# Altium PCB Carte_test_JLC.PcbDoc
Units mm, origin at the board's own origin, x right, y up, seen from the top; angles counter-clockwise.
Board outline 40.15 x 36.59 mm, 4 copper layers (Top Copper, Ground Plane, Power Plane, Bottom Copper), stack 1.57 mm thick; 32 components, 0 nets, 105 pads, 1 vias.
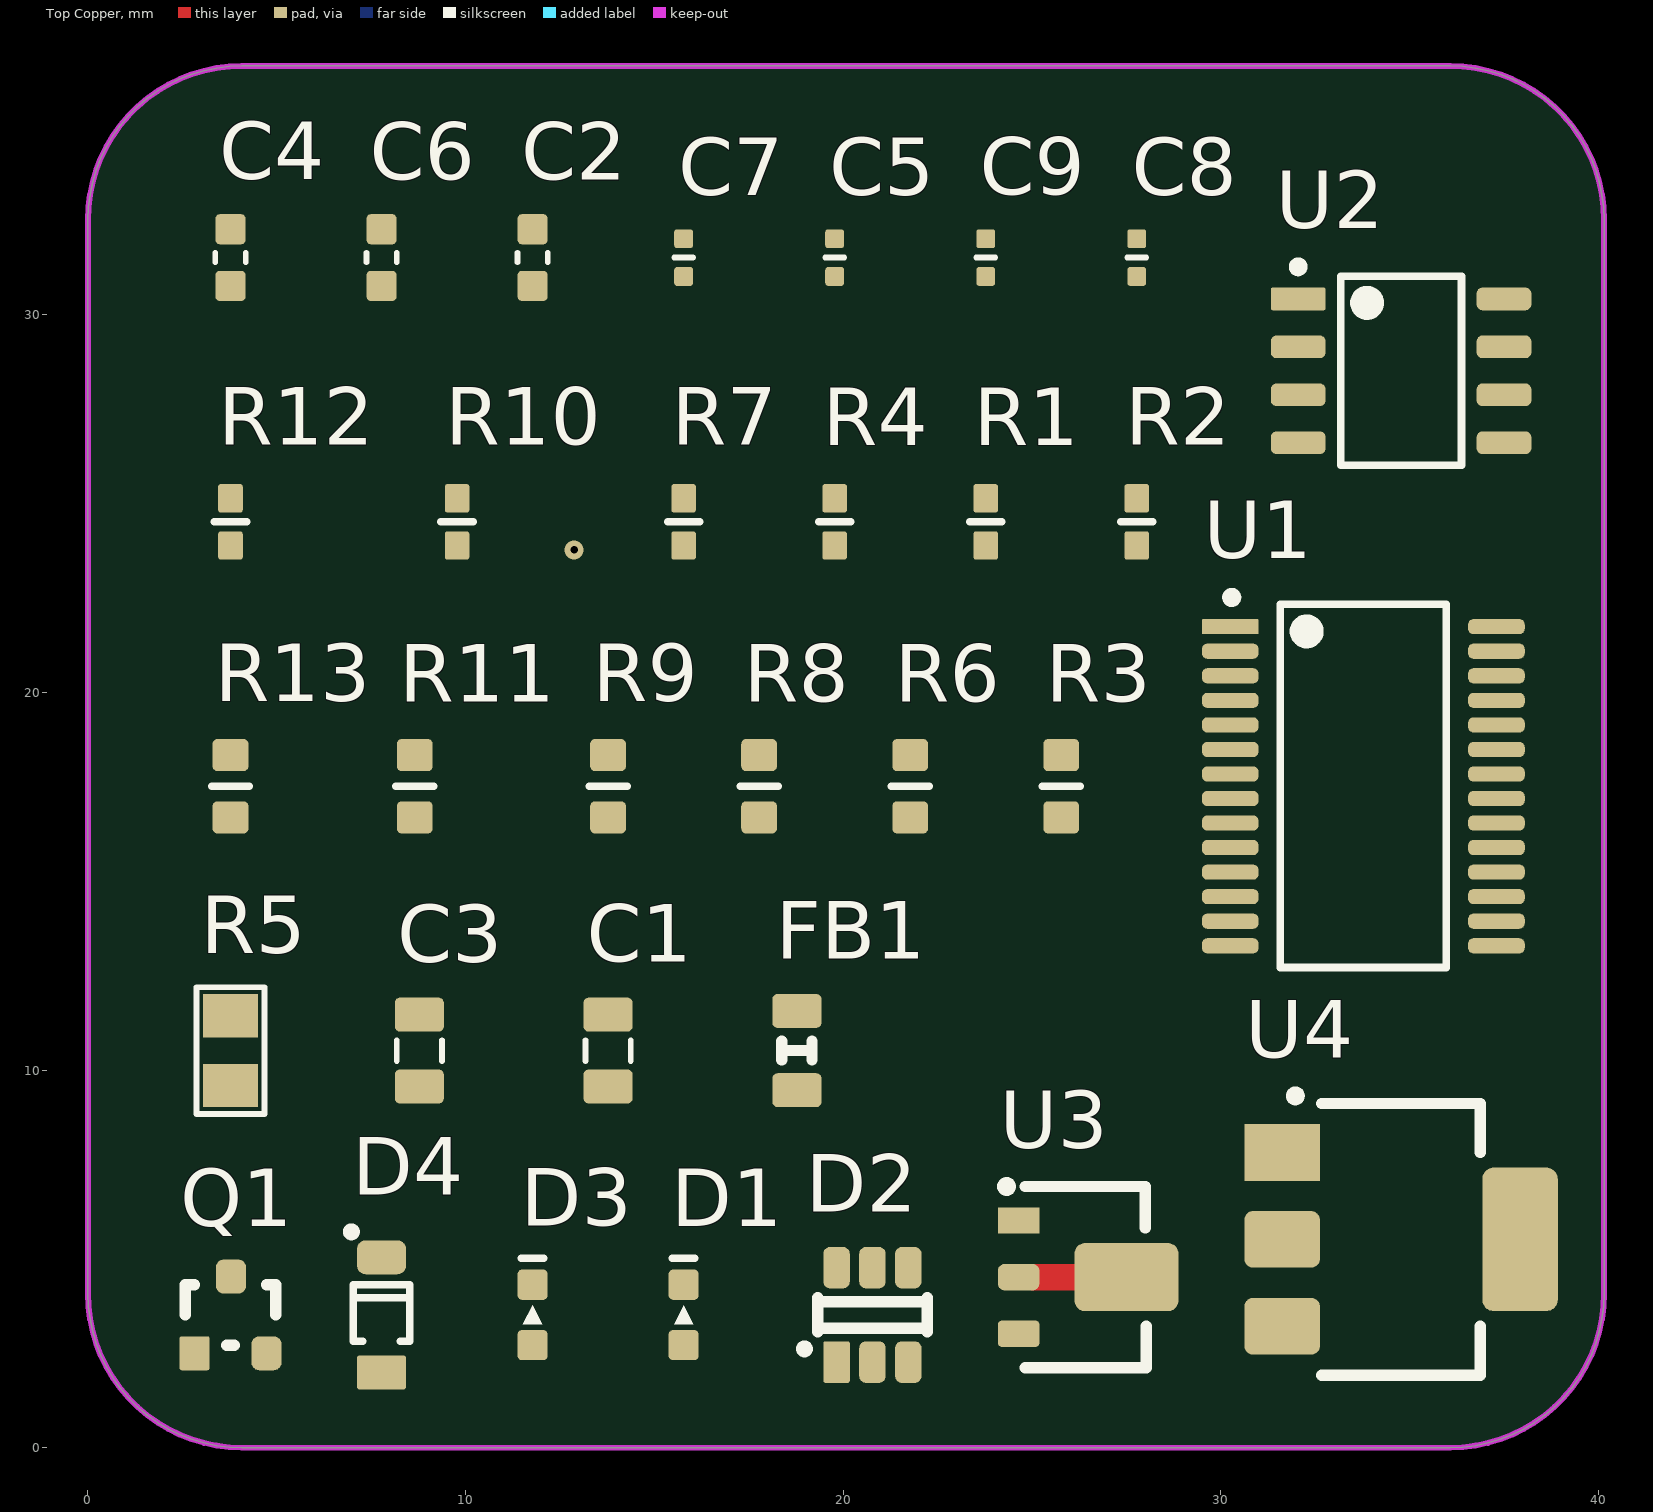
[diagram p0: Top Copper view]
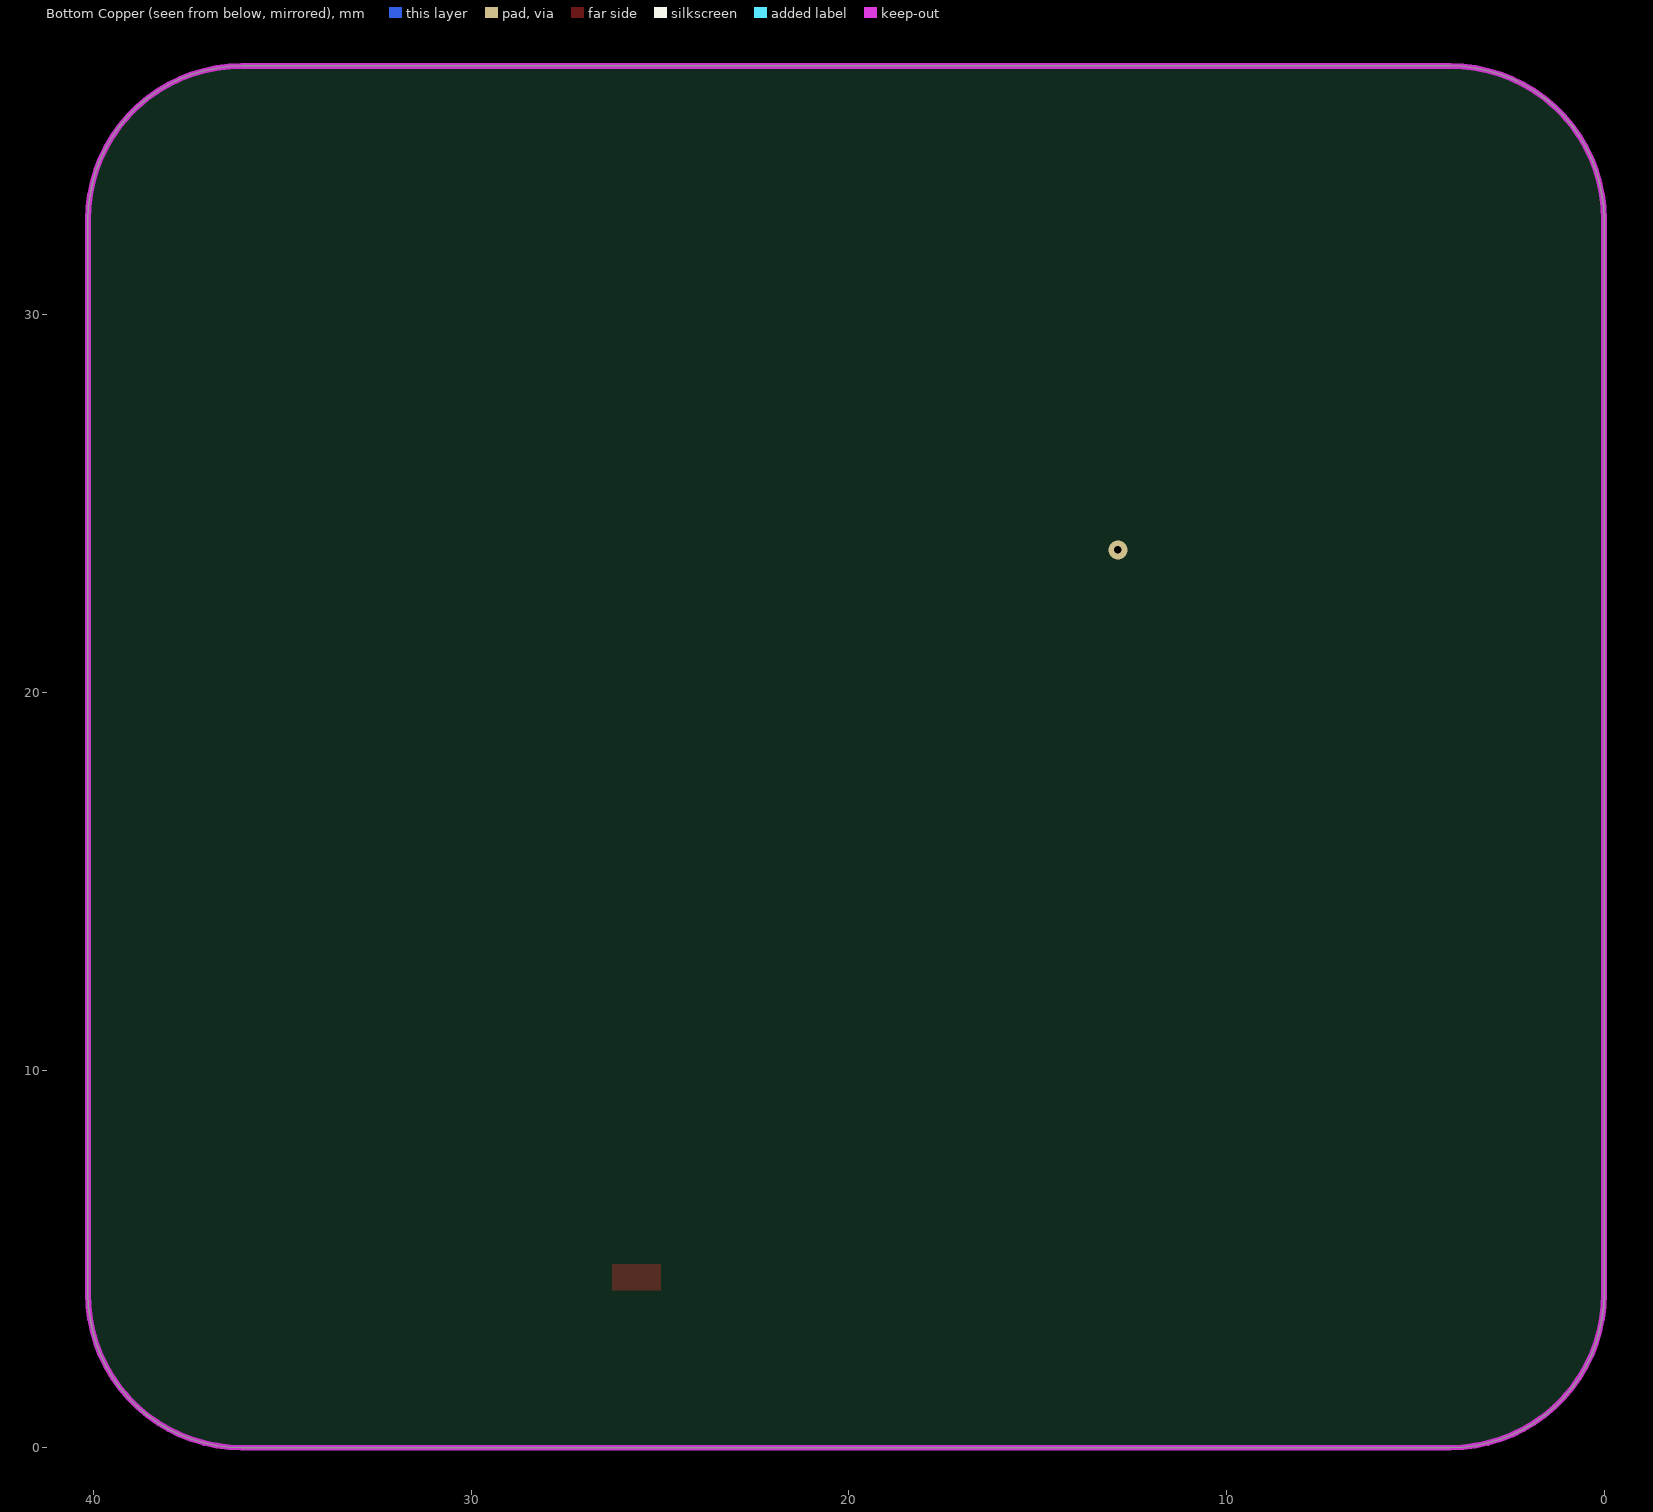
[diagram p1: Bottom Copper view, seen from below]
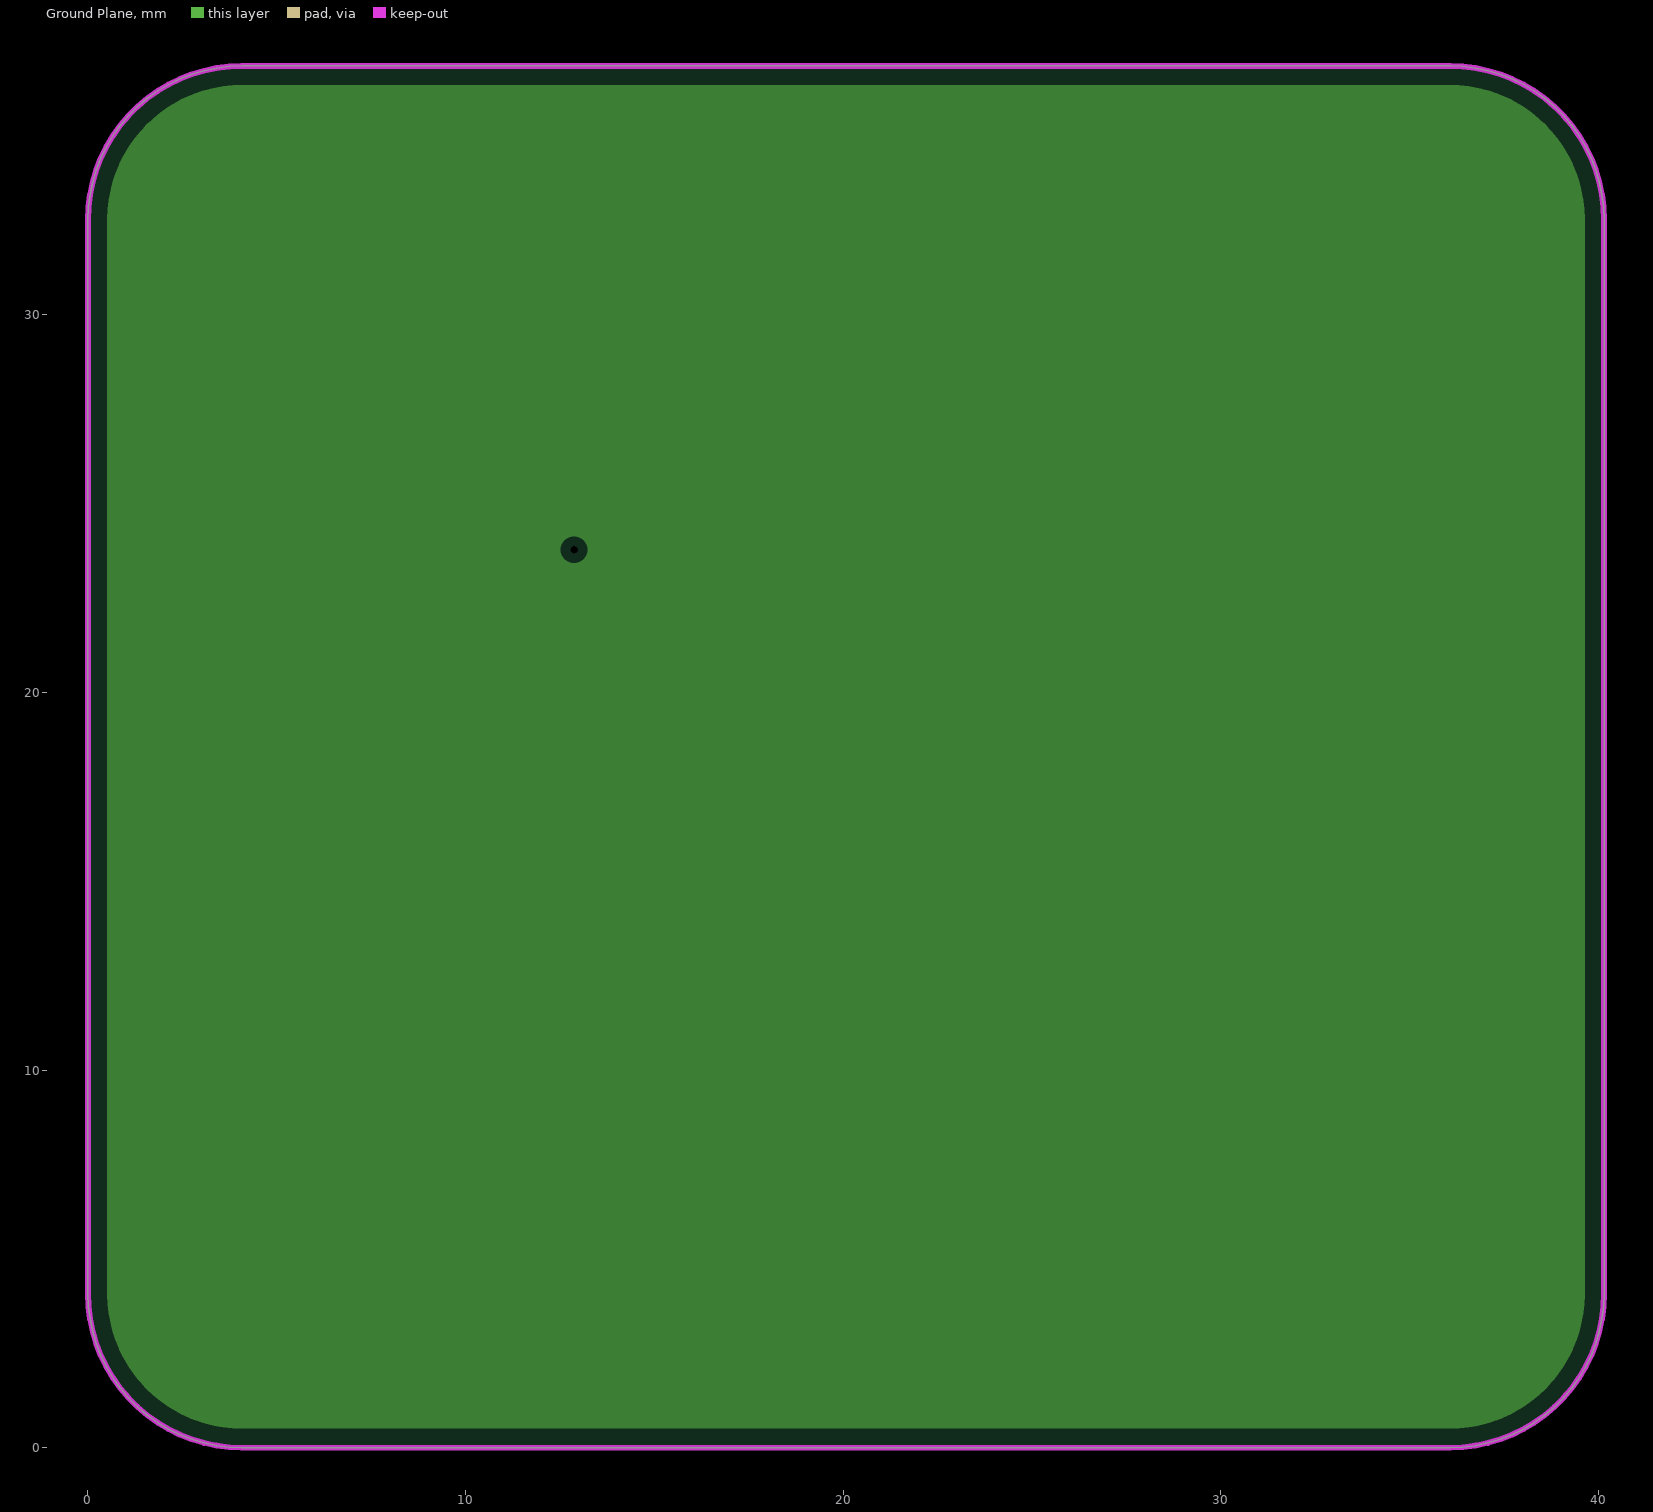
[diagram p2: Ground Plane, clearances drawn from the general rule]
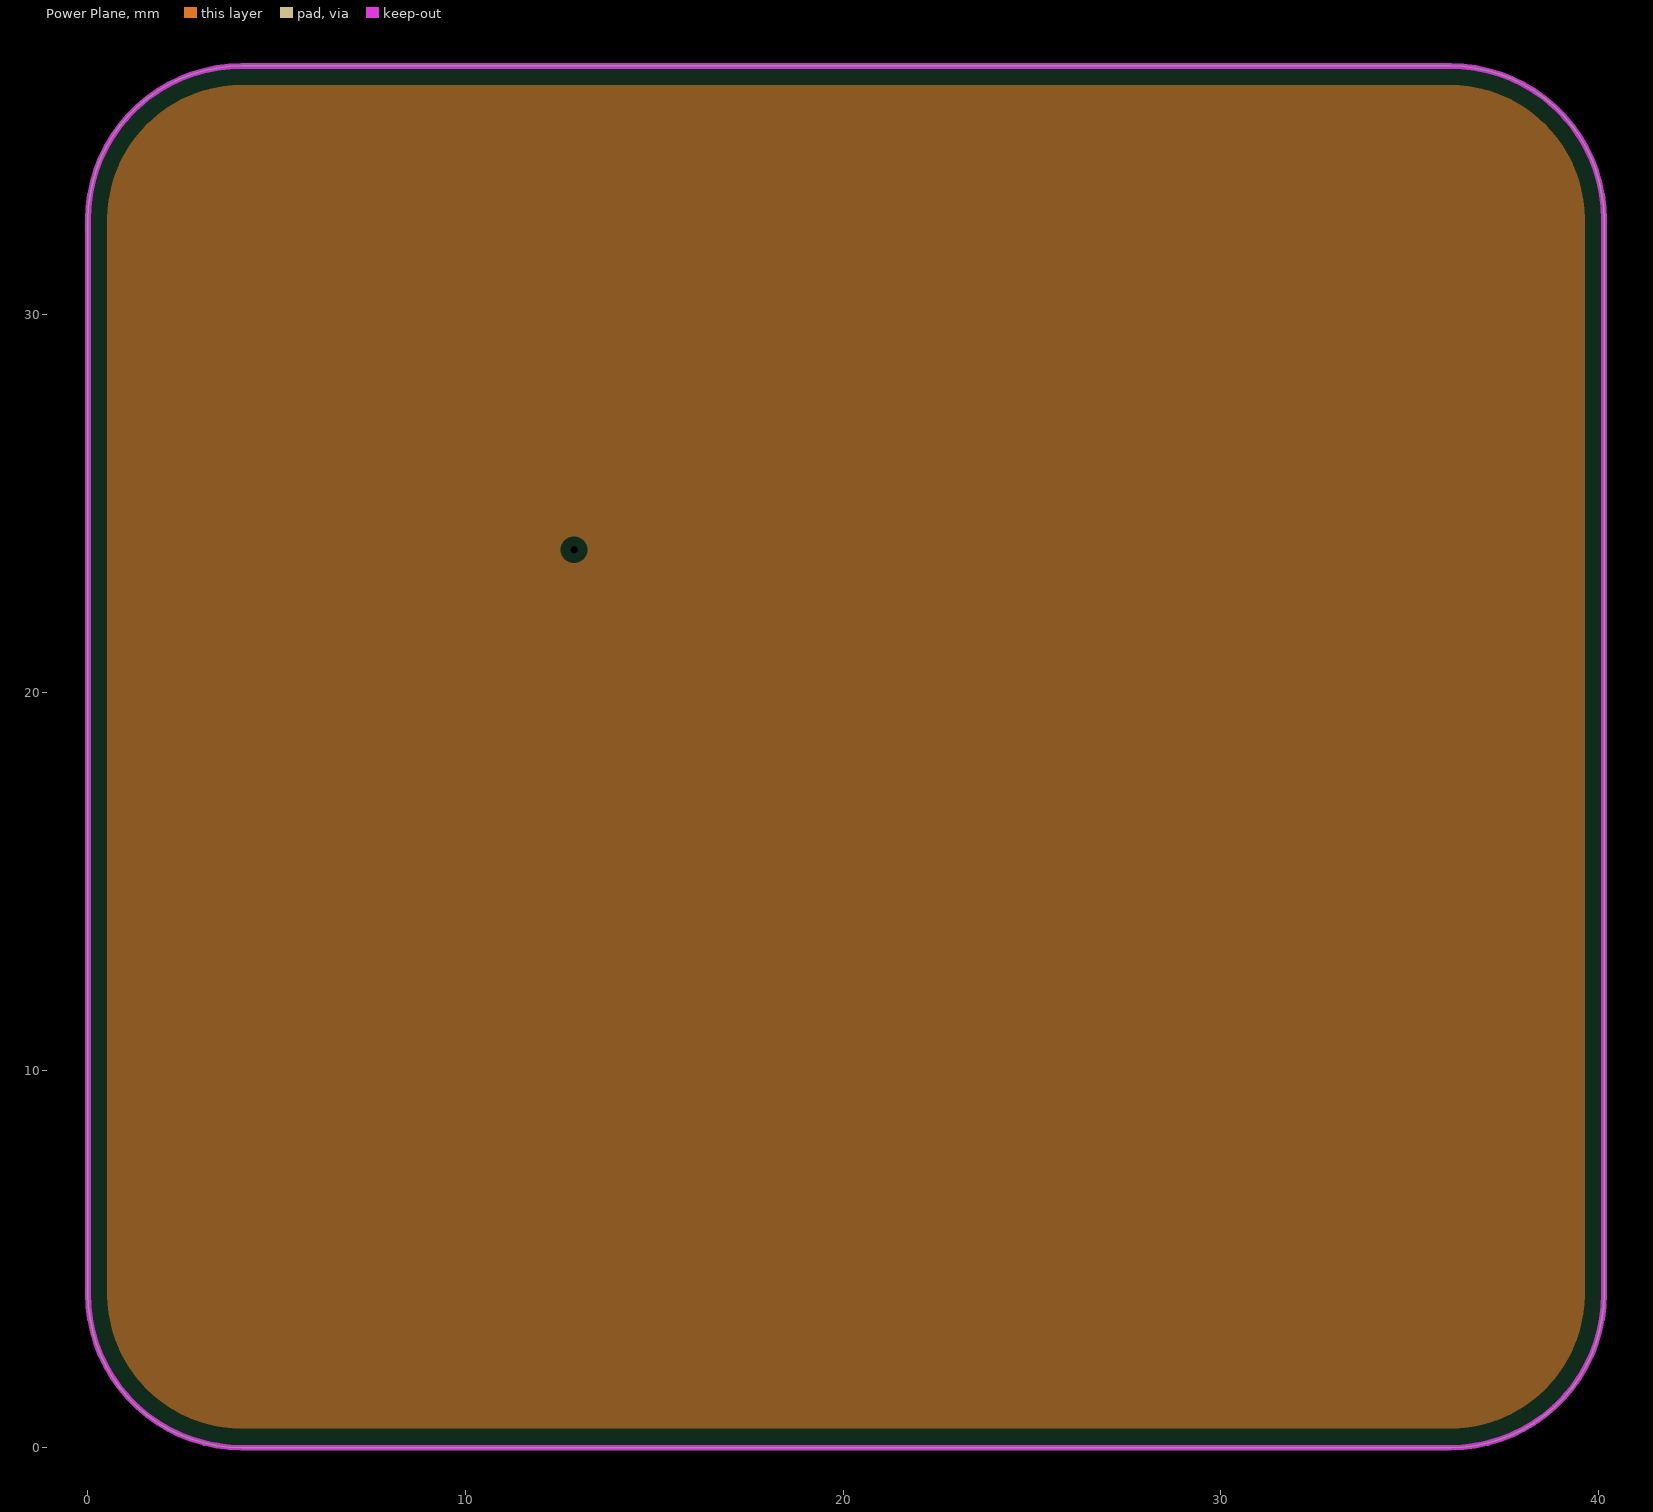
[diagram p3: Power Plane, clearances drawn from the general rule]

## Layer stack, top to bottom
Top Mask: solder mask 0.015, Solder Resist, Dk 3.8
Top Copper: signal copper 0.035
Dielectric 1: prepreg 0.2, 7628, Dk 4.6
Ground Plane: plane copper 0.0175
Core: core 1.065, FR-4, Dk 4.5
Power Plane: plane copper 0.0175
Dielectric 2: prepreg 0.2, 7628, Dk 4.6
Bottom Copper: signal copper 0.035
Bottom Mask: solder mask 0.015, Solder Resist, Dk 3.8

## Board outline
0,4.075 cw(c4.075,4.075) 0,4.075 cw(c0.075,4.075) 0,4.075 0,32.515 cw(c0.075,32.515) 0,32.516 cw(c4.075,32.515) 4.075,36.591 cw(c4.075,36.515) 4.076,36.591 36.075,36.591 cw(c36.075,32.515) 40.151,32.516 cw(c40.075,32.515) 40.151,32.515 cw(c40.075,32.515) 40.151,32.515 ccw(c36.075,32.515) 40.151,32.516 40.151,4.075 cw(c40.075,4.075) 40.151,4.075 ccw(c36.075,4.075) 40.151,4.075 ccw(c40.075,4.075) 40.151,4.075 cw(c36.075,4.075) 36.075,0 4.075,0 cw(c4.075,4.075)

## Design rules (kind name [scope] priority, off if disabled: settings)
AssemblyTestPointUsage [All] p1 off:
AssemblyTestpoint [All] p1 off: testpointundercomponent=TRUE minsize=1.016 maxsize=2.54 preferedsize=1.524 minholesize=0 maxholesize=1.016 preferedholesize=0.813 testpointgrid=0.025 usegrid=TRUE gridtolerance=0 allowsidetop=TRUE allowsidebottom=TRUE
BoardOutlineClearance [All] p1: gap=0.2 ignorepadtopadclearanceinfootprint=FALSE
Clearance Clearance_Outer_layer [OnOutside] p1: gap=0.127 ignorepadtopadclearanceinfootprint=FALSE except(0.09: Arc-Arc Arc-Track Track-Track; 0.2: Arc-SMDPad Track-SMDPad; 0.254: Arc-Hole Track-Hole SMDPad-Hole THPad-Hole Via-Hole Fill-Hole Poly-Hole Region-Hole Text-Hole; 0.33: Arc-THPad Track-THPad SMDPad-THPad; 0.54: THPad-THPad)
Clearance Clearance_Inner_layer [not OnOutside] p2: gap=0.127 ignorepadtopadclearanceinfootprint=FALSE except(0.2: Arc-SMDPad Track-SMDPad; 0.254: Arc-Hole Track-Hole SMDPad-Hole THPad-Hole Via-Hole Fill-Hole Poly-Hole Region-Hole Text-Hole; 0.33: Arc-THPad Track-THPad SMDPad-THPad; 0.54: THPad-THPad)
ComponentClearance [IsComponent and (not (InComponent('J202') or InComponent('J204'))) vs IsComponent and (not (InComponent('J201') or InComponent('J203')))] p1: gap=0.2 collisioncheckmode=3 verticalgap=2540 showdistances=FALSE
DiffPairsRouting [All] p1 off: maxlimit=0.254 minlimit=0.254 mostfreqgap=0.254 toplayer_minwidth=0.381 toplayer_maxwidth=0.381 toplayer_prefwidth=0.381 bottomlayer_minwidth=0.381 bottomlayer_maxwidth=0.381 bottomlayer_prefwidth=0.381 maxuncoupledlength=12.7
FabricationTestPointUsage TestPointUsage [All] p1 off: valid=0 allowmultiple=FALSE
FabricationTestpoint Testpoint [All] p1 off: side=3 testpointundercomponent=TRUE minsize=1.016 maxsize=2.54 preferedsize=1.524 minholesize=0 maxholesize=1.016 preferedholesize=0.813 testpointgrid=0.025 allowsidetop=TRUE allowsidebottom=TRUE usegrid=TRUE gridtolerance=0
FanoutControl Fanout_BGA [IsBGA] p1 off: bgadir=Out bgaviamode=Centered fanoutstyle=Auto fanoutdirection=Alternating viagrid=0.025 // Fanout_BGA (Default Rule)
FanoutControl Fanout_LCC [IsLCC] p2 off: bgadir=Out bgaviamode=Centered fanoutstyle=Auto fanoutdirection=Alternating viagrid=0.025 // Fanout_LCC (Default Rule)
FanoutControl Fanout_SOIC [IsSOIC] p3 off: bgadir=Out bgaviamode=Centered fanoutstyle=Auto fanoutdirection=Alternating viagrid=0.025 // Fanout_SOIC (Default Rule)
FanoutControl Fanout_Small [(CompPinCount < 5)] p4 off: bgadir=Out bgaviamode=Centered fanoutstyle=Auto fanoutdirection=OutThenIn viagrid=0.025 // Fanout_Small (Default Rule)
FanoutControl Fanout_Default [All] p5 off: bgadir=Out bgaviamode=Centered fanoutstyle=Auto fanoutdirection=Alternating viagrid=0.025 // Fanout_Default (Default Rule)
HoleSize [All] p1: absolutevalues=TRUE maxlimit=6.3 minlimit=0.2 maxpercent=80.000 minpercent=20.000
HoleToHoleClearance ViaToViaClearance [IsVia vs IsVia] p1: gap=0.254 allowstackedmicrovias=TRUE
HoleToHoleClearance [All] p2: gap=0.54 allowstackedmicrovias=TRUE
MinimumAnnularRing [All] p1: minimumring=0.13
MinimumSolderMaskSliver [All] p1: minsoldermaskwidth=0.075
NetAntennae NetAntenna [All] p1: netantennaetolerance=0
PlaneClearance [All] p1: clearance=0.254
PlaneConnect [All] p1: planeconnectstyle=Direct reliefexpansion=0.3 reliefentries=4 reliefconductorwidth=0.3 reliefairgap=0.2
PolygonConnect [All] p1: thpad.connectstyle=Relief thpad.reliefconductorwidth=0.2 thpad.reliefentries=4 thpad.polygonreliefangle="90 Angle" thpad.airgapwidth=0.254 smdpad.connectstyle=Relief smdpad.reliefconductorwidth=0.2 smdpad.reliefentries=4 smdpad.polygonreliefangle="90 Angle" smdpad.airgapwidth=0.254 via.connectstyle=Direct via.reliefconductorwidth=0.2 via.reliefentries=4 via.polygonreliefangle="90 Angle" via.airgapwidth=0.254
RoutingVias [All] p1: holewidth=0.2 width=0.5 viastyle="Through Hole" minholewidth=0.2 minwidth=0.45 maxholewidth=0.3 maxwidth=0.9
SMDEntry [All] p1: side=TRUE corner=TRUE anyangle=TRUE
SilkToSilkClearance [All] p1 off: silktosilkclearance=0.15
SilkToSolderMaskClearance [IsPad] p1: minsilkscreentomaskgap=0.15 clearancetoexposedcopper=TRUE
SolderMaskExpansion [All] p1: expansion=0.05 istentingtop=FALSE
Width Width_Outer_Layer [OnLayer('Component Side') or OnLayer('Solder Side')] p1: maxlimit=3 minlimit=0.09 preferedwidth=0.15
Width Width_Inner_Layer [All] p2: maxlimit=3 minlimit=0.127 preferedwidth=0.15
11 further rules are at their usual default settings.

## Classes and differential pairs
net class USB: NetJ207_4 NetU200_2 NetU200_3 NetU200_6 NetU200_9 NetU200_10 NetU200_11 NetU200_12 NetU200_13 NetU200_14 NetU200_19 NetU200_27 NetU200_28
net class NUCLEO: NetJ221_9 NetJ221_25 NetJ221_33 NetJ221_39 NetJ221_40 NetJ222_39 NetJ222_40
net class DYNAMIXEL: NetJ240_2
net class CAN: NetU201_5

## Components (designator, comment, footprint, x,y, rotation, side; value= is the part's Value field where it differs from the comment)
C1 "10uF" "WCAP-CSGP_0805, 2x1.25x1.25" 13.775,10.515 r90 top
C2 "4.7uF" "WCAP-CSGP_0603, 1.6x0.8x0.8" 11.775,31.515 r90 top
C3 "1uF" "WCAP-CSGP_0805, 2x1.25x1.25" 8.775,10.515 r90 top
C4 "1uF" "WCAP-CSGP_0603, 1.6x0.8x0.8" 3.775,31.515 r90 top
C5 "1uF" "WCAP-CSGP_0402, 1x0.5x0.5" 19.775,31.515 r90 top
C6 "100nF" "WCAP-CSGP_0603, 1.6x0.8x0.8" 7.775,31.515 r90 top
C7 "100nF" "WCAP-CSGP_0402, 1x0.5x0.5" 15.775,31.515 r90 top
C8 "10nF" "WCAP-CSGP_0402, 1x0.5x0.5" 27.775,31.515 r90 top
C9 "1nF" "WCAP-CSGP_0402, 1x0.5x0.5" 23.775,31.515 r90 top
D1 "150060YS75000" SMCW_0603 15.775,3.515 r270 top value=Jaune
D2 "824001" SOT-23-6L 20.775,3.515 r0 top value=5V
D3 "150060RS75000" SMCW_0603 11.775,3.515 r270 top value=Rouge
D4 "RBR3MM40ATFTR" SOD-123FL 7.775,3.515 r90 top value=40V
FB1 "742792023" "WE-CBF_0805_High Current" 18.775,10.515 r90 top value=120
Q1 "2N7002" SOT-23 3.775,3.515 r0 top
R1 "RC0402FR-07100KL" RESC1005X04N 23.775,24.515 r90 top value=100k
R2 "RC0402FR-0710KL" RESC1005X04N 27.775,24.515 r90 top value=10k
R3 "RC0603FR-0710KL" RESC1608X06N 25.775,17.515 r90 top value=10k
R4 "RC0402FR-074K7L" RESC1005X04N 19.775,24.515 r90 top value=4.7k
R5 "RC0805FR-072K7L" RESC2012X06N 3.775,10.515 r90 top value=2.7k
R6 "RC0603FR-071K8L" RESC1608X06N 21.775,17.515 r90 top value=1.8k
R7 "RC0402FR-071KL" RESC1005X04N 15.775,24.515 r90 top value=1k
R8 "RC0603FR-071KL" RESC1608X06N 17.775,17.515 r90 top value=1k
R9 "RC0603FR-07620RL" RESC1608X06N 13.775,17.515 r90 top value=620
R10 "RC0402FR-07330RL" RESC1005X04N 9.775,24.515 r90 top value=330
R11 "RC0603FR-0768RL" RESC1608X06N 8.655,17.515 r90 top value=68
R12 "RC0402FR-0722RL" RESC1005X04N 3.775,24.515 r90 top value=22
R13 "RC0603FR-070RL" RESC1608X06N 3.775,17.515 r90 top value=0
U1 "FT232RL" SSOP28 33.775,17.515 r0 top
U2 "MCP2551-I/SN" SOIC127P600X175-8N 34.775,28.515 r0 top
U3 "HT7533-1" SOT89-150P350X160-3N 26.775,4.515 r0 top value=3.3V
U4 "ZLDO1117G33TA" SOT223 34.775,5.515 r0 top value=3.3V

## Footprints (in the part's own frame and the unit in brackets; to place one, negate y for a bottom-side part, rotate by r counter-clockwise, add the part's x,y. Pads: shape width x height; smd on the part's side, far side on the other; paste and mask are expansions set on the pad)
RESC1005X04N [mm] "Chip Resistor, 2-Leads, Body 1,1x0,5mm, IPC Medium Density"
  rrect20% 0.75x0.65 smd: 1(-0.625,0) 2(0.625,0)
  silkscreen extent 0,-0.43 0,0.43, body extent -0.5,-0.25 0.5,0.25, height 0.35
RESC1608X06N [mm] "Chip Resistor, 2-Leads, Body 1,6x0,8mm, IPC Medium Density"
  rrect30% 0.85x0.95 smd: 1(-0.825,0) 2(0.825,0)
  silkscreen extent 0,-0.5 0,0.5, body extent -0.78,-0.43 0.78,0.43, height 0.45
RESC2012X06N [mm] "Chip Resistor, 2-Leads, Body 2,0x1,3mm, IPC Medium Density"
  rect 1.15x1.45 smd: 1(-0.925,0) 2(0.925,0)
  silkscreen extent -1.68,-0.9 1.68,0.9, body extent -1,-0.62 1,0.63, height 0.45
SMCW_0603 [mm] "Chip LED, 2-Leads, Body 1.6x0.8mm, IPC Medium Density"
  rrect30% 0.8x0.8 smd: 1(-0.8,0) 2(0.8,0)
  silkscreen extent -1.5,-0.3 0.25,0.3, body extent -0.8,-0.4 0.8,0.4, height 0.7
SOD-123FL [mm] "SOD-123FL"
  rrect15% 0.9x1.3 smd: 1(-1.525,0)
  rrect50% 0.9x1.3 smd: 2(1.525,0)
  silkscreen extent -0.7,-0.75 2.3,0.9, body extent -1.8,-0.83 1.8,0.82, height 0.95
SOIC127P600X175-8N [mm] "SOIC, 8-Leads, Body 4,90x3,90mm, Pitch 1,27mm, IPC Medium Density"
  rrect15% 1.45x0.6 smd: 1(-2.725,1.905)
  rrect50% 1.45x0.6 smd: 2(-2.725,0.635) 3(-2.725,-0.635) 4(-2.725,-1.905) 5(2.725,-1.905) 6(2.725,-0.635) 7(2.725,0.635) 8(2.725,1.905)
  silkscreen extent -2.85,-2.5 1.6,2.88, body extent -3,-2.54 3,2.54, height 1.7
SOT89-150P350X160-3N [mm] "SOT89, 3-Leads, Body 4.5x4.1mm, Pitch 1.5mm, Lead Span 1.05mm, IPC Medium Density"
  rect 1.1x0.7 smd paste-0.05 mask+0.102: 1(-2.127,1.5)
  rrect50% 1.1x0.7 smd paste-0.05 mask+0.102: 2(-2.128,0)
  rrect30% 2.75x1.8 smd paste-10: 2(0.728,0)
  rrect30% 1.1x0.7 smd paste-0.05 mask+0.102: 3(-2.127,-1.5)
  Top Copper region: -1.8,-0.351 -0.5,-0.351 -0.5,0.348 -1.8,0.348
  silkscreen extent -2.57,-2.4 1.25,2.52, body extent -2.4,-2.25 1.9,2.25, height 1.53
SOT223 [mm] "SOT223, 4-Leads, Body 6,7x7,3mm (max), Pitch 2,30mm, IPC Medium Density"
  rect 2x1.5 smd: 1(-3.15,2.3)
  rrect30% 2x1.5 smd: 2(-3.15,0) 3(-3.15,-2.3)
  rrect30% 2x3.8 smd: 4(3.15,0)
  silkscreen extent -2.92,-3.6 2.1,3.92, body extent -3.65,-3.35 3.65,3.35, height 1.82
SOT-23 [mm]
  rrect15% 0.8x0.9 smd: 1(-0.953,-1.016)
  rrect50% 0.8x0.9 smd: 2(0.953,-1.016) 3(0.013,1.016)
  silkscreen extent -1.2,-0.8 1.2,0.8, body extent -1.5,-1.13 1.5,1.13, height 1.22
SOT-23-6L [mm]
  rrect15% 0.7x1.1 smd: 1(-0.95,-1.25)
  rrect50% 0.7x1.1 smd: 2(0,-1.25) 3(0.95,-1.25) 4(0.95,1.25) 5(0,1.25) 6(-0.95,1.25)
  silkscreen extent -1.9,-1 1.45,0.45, body extent -1.45,-1.4 1.45,1.4, height 1.16
SSOP28 [mm]
  rrect15% 1.5x0.4 smd: 1(-3.525,4.225)
  rrect70% 1.5x0.4 smd: 2(-3.525,3.575) 3(-3.525,2.925) 4(-3.525,2.275) 5(-3.525,1.625) 6(-3.525,0.975) 7(-3.525,0.325) 8(-3.525,-0.325) 9(-3.525,-0.975) 10(-3.525,-1.625) 11(-3.525,-2.275) 12(-3.525,-2.925) 13(-3.525,-3.575) 14(-3.525,-4.225) 15(3.525,-4.225) 16(3.525,-3.575) 17(3.525,-2.925) 18(3.525,-2.275) 19(3.525,-1.625) 20(3.525,-0.975) 21(3.525,-0.325) 22(3.525,0.325) 23(3.525,0.975) 24(3.525,1.625) 25(3.525,2.275) 26(3.525,2.925) 27(3.525,3.575) 28(3.525,4.225)
  silkscreen extent -3.61,-4.8 2.2,5.13, body extent -3.88,-5.17 3.88,5.17, height 2.11
"WCAP-CSGP_0402, 1x0.5x0.5" [mm] "WCAP-CSGP Ceramic Capacitors, size 0402, body 1x0.5x0.5"
  rrect30% 0.5x0.5 smd: 1(-0.5,0) 2(0.5,0)
  silkscreen extent 0,-0.25 0,0.25, body extent -0.5,-0.26 0.5,0.26, height 0.52
"WCAP-CSGP_0603, 1.6x0.8x0.8" [mm] "WCAP-CSGP Ceramic Capacitors, size 0603, body 1.6x0.8x0.8"
  rrect30% 0.8x0.8 smd: 1(-0.75,0) 2(0.75,0)
  silkscreen extent -0.13,-0.4 0.13,0.4, body extent -1,-0.39 1,0.39, height 0.8
"WCAP-CSGP_0805, 2x1.25x1.25" [mm] "WCAP-CSGP Ceramic Capacitors, size 0805, body 2x1.25x1.25"
  rrect30% 0.9x1.3 smd: 1(-0.95,0) 2(0.95,0)
  silkscreen extent -0.28,-0.6 0.28,0.6, body extent -1,-0.63 1,0.62, height 1.25
"WE-CBF_0805_High Current" [mm] "SMD EMI Suppression Ferrite  Bead, body 2.0mmx1.2mm"
  rrect30% 0.9x1.3 smd: 1(-1.05,0) 2(1.05,0)
  silkscreen extent -0.25,-0.4 0.25,0.4, body extent -1,-0.6 1,0.6, height 0.93

## Part data
C1: library part "WCAP-CSGP, 885012207026", "CAP CER 10uF 10V X7R 0805", Manufacturer="Wurth Elektronik", Manufacturer Part Number=885012207026, RatedVoltage=10V, SUPPLIER PART NUMBER 1=2495189, CeramicType=X7R, ComponentLink1Description=Datasheet, ComponentLink1URL=http://katalog.we-online.com/pbs/datasheet/885012207026.pdf, Size=0805, SUPPLIER 1=Farnell, SUPPLIER 2=JLCPCB, Supplier Footprint 2=0805, SUPPLIER PART NUMBER 2=C15850
C2: library part "WCAP-CSGP, 885012106012", "CAP CER 4.7UF 10V X5R 0603", Manufacturer="Wurth Elektronik", Manufacturer Part Number=885012106012, RatedVoltage=10V, CeramicType=X5R, ComponentLink1Description=Datasheet, ComponentLink1URL=http://katalog.we-online.com/pbs/datasheet/885012106012.pdf, Size=0603, SUPPLIER 2=JLCPCB, Supplier Footprint 2=0603, SUPPLIER PART NUMBER 2=C19666
C3: library part "WCAP-CSGP, 885012207103", "CAP CER 1uF 50V X7R 0805", Manufacturer="Wurth Elektronik", Manufacturer Part Number=885012207103, RatedVoltage=50V, CeramicType=X7R, ComponentLink1Description=Datasheet, ComponentLink1URL=http://katalog.we-online.com/pbs/datasheet/885012207103.pdf, Size=0805, SUPPLIER 2=JLCPCB, Supplier Footprint 2=0805, SUPPLIER PART NUMBER 2=C28323
C4: library part "WCAP-CSGP, 885012106017", "CAP CER 1UF 16V X5R 0603", Manufacturer="Wurth Elektronik", Manufacturer Part Number=885012106017, RatedVoltage=16V, CeramicType=X5R, ComponentLink1Description=Datasheet, ComponentLink1URL=http://katalog.we-online.com/pbs/datasheet/885012106017.pdf, Size=0603, SUPPLIER 2=JLCPCB, Supplier Footprint 2=0603, SUPPLIER PART NUMBER 2=C15849
C5: library part "WCAP-CSGP, 885012105012", "CAP CER 1UF 10V X5R 0402", Manufacturer="Wurth Elektronik", Manufacturer Part Number=885012105012, RatedVoltage=10V, CeramicType=X5R, ComponentLink1Description=Datasheet, ComponentLink1URL=http://katalog.we-online.com/pbs/datasheet/885012105012.pdf, Size=0402, SUPPLIER 2=JLCPCB, Supplier Footprint 2=0402, SUPPLIER PART NUMBER 2=C52923
C6: library part "WCAP-CSGP, 885012206095", "CAP CER 100nF 50V X7R 0603", Manufacturer="Wurth Elektronik", Manufacturer Part Number=885012206095, RatedVoltage=50V, CeramicType=X7R, ComponentLink1Description=Datasheet, ComponentLink1URL=http://katalog.we-online.com/pbs/datasheet/885012206095.pdf, Size=0603, SUPPLIER 2=JLCPCB, Supplier Footprint 2=0603, SUPPLIER PART NUMBER 2=C14663
C7: library part "WCAP-CSGP, 885012205037", "CAP CER 100nF 16V X7R 0402", Manufacturer="Wurth Elektronik", Manufacturer Part Number=885012205037, RatedVoltage=16V, CeramicType=X7R, ComponentLink1Description=Datasheet, ComponentLink1URL=http://katalog.we-online.com/pbs/datasheet/885012205037.pdf, Size=0402, SUPPLIER 2=JLCPCB, Supplier Footprint 2=0402, SUPPLIER PART NUMBER 2=C1525
C8: library part "WCAP-CSGP, 885012205067", "CAP CER 10nF 50V X7R 0402", Manufacturer="Wurth Elektronik", Manufacturer Part Number=885012205067, RatedVoltage=50V, CeramicType=X7R, ComponentLink1Description=Datasheet, ComponentLink1URL=http://katalog.we-online.com/pbs/datasheet/885012205067.pdf, Size=0402, SUPPLIER 2=JLCPCB, Supplier Footprint 2=0402, SUPPLIER PART NUMBER 2=C15195
C9: library part "WCAP-CSGP, 885012205061", "CAP CER 1nF 50V X7R 0402", Manufacturer="Wurth Elektronik", Manufacturer Part Number=885012205061, RatedVoltage=50V, CeramicType=X7R, ComponentLink1Description=Datasheet, ComponentLink1URL=http://katalog.we-online.com/pbs/datasheet/885012205061.pdf, Size=0402, SUPPLIER 2=JLCPCB, Supplier Footprint 2=0402, SUPPLIER PART NUMBER 2=C1523
D1: library part "WL-SMCW 0603  150060YS75000", "SMD mono-color Chip LED, WL-SMCW, Yellow", Manufacturer="Wurth Elektronik", SUPPLIER PART NUMBER 1=2322074, ComponentLink1Description=Datasheet, ComponentLink1URL=http://katalog.we-online.com/led/datasheet/150060YS75000.pdf, Manufacturer Part Number=150060YS75000, SUPPLIER 1=Farnell, SUPPLIER 2=JLCPCB, Supplier Footprint 2=LED_0603, SUPPLIER PART NUMBER 2=C72038
D2: "WE-TVS TVS Diode 4+1Ch 5V SOT23-6L", Manufacturer="Wurth Elektronik", SUPPLIER PART NUMBER 1=1748613, ComponentLink1Description=Datasheet, ComponentLink1URL=https://www.we-online.com/catalog/datasheet/824001.pdf, Manufacturer Part Number=824001, SUPPLIER 1=Farnell, SUPPLIER 2=JLCPCB, Supplier Footprint 2=SOT-23-6L, SUPPLIER PART NUMBER 2=C85364, Type=TVS
D3: library part "WL-SMCW 0603  150060RS75000", "SMD mono-color Chip LED, WL-SMCW, Red", Manufacturer="Wurth Elektronik", SUPPLIER PART NUMBER 1=2322071, ComponentLink1Description=Datasheet, ComponentLink1URL=http://katalog.we-online.com/led/datasheet/150060RS75000.pdf, Manufacturer Part Number=150060RS75000, SUPPLIER 1=Farnell, SUPPLIER 2=JLCPCB, Supplier Footprint 2=LED_0603, SUPPLIER PART NUMBER 2=C2286
D4: "DIODE SCHOTTKY 40V 3A SOD123-FL", ContinuousForwardCurrent=3A, Manufacturer=ROHM, SUPPLIER PART NUMBER 1=2581593, ComponentLink1Description=Datasheet, ComponentLink1URL=http://www.farnell.com/datasheets/2067190.pdf, ComponentLink2Description=Manufacturer, ComponentLink2URL=http://www.rohm.com/web/global/products/-/product/RBR3MM40ATF, Manufacturer Part Number=RBR3MM40ATFTR, SUPPLIER 1=Farnell, SUPPLIER 2=JLCPCB, Supplier Footprint 2=SOD-123, SUPPLIER PART NUMBER 2=C8598, Type=Schottky
FB1: library part "WE-CBF, 742792023", "Ferrite Bead 120ohm 0805 3A", Manufacturer="Wurth Elektronik", RatedCurrent=3A, SUPPLIER PART NUMBER 1=1635732, ComponentLink1Description=Manufacturer, ComponentLink1URL=https://www.we-online.com/catalog/en/WE-CBF/?sq=742792023#742792023, ComponentLink2Description=Datasheet, ComponentLink2URL=https://www.we-online.com/catalog/datasheet/742792023.pdf, Manufacturer Part Number=742792023, SUPPLIER 1=Farnell, SUPPLIER 2=JLCPCB, Supplier Footprint 2=0805, SUPPLIER PART NUMBER 2=C1015
Q1: "MOSFET N 60V 115MA SOT23", Manufacturer="Changjiang Electronics Tech (CJ)", SUPPLIER PART NUMBER 1=1510761, ComponentLink1Description=Datasheet, ComponentLink1URL=https://datasheet.lcsc.com/szlcsc/1810151612_Changjiang-Electronics-Tech-CJ-2N7002_C8545.pdf, Manufacturer Part Number=2N7002, SUPPLIER 1=Farnell, SUPPLIER 2=JLCPCB, Supplier Footprint 2=SOT-23-3, SUPPLIER PART NUMBER 2=C8545
R1: "RES SMD 100K OHM 1% 1/16W 0402", Manufacturer=Yageo, POWER=63mW, SUPPLIER PART NUMBER 1=9239472, ComponentLink1Description=Manufacturer, ComponentLink1URL=http://www.yageo.com/NewPortal/_en/index.jsp, ComponentLink2Description=Datasheet, ComponentLink2URL=http://www.farnell.com/datasheets/2167052.pdf, Manufacturer Part Number=RC0402FR-07100KL, Precision=±1%, SUPPLIER 1=Farnell, SUPPLIER 2=JLCPCB, Supplier Footprint 2=0402, SUPPLIER PART NUMBER 2=C25741, Type="Thick Film", Vmax=50V
R2: "RES SMD 10K OHM 1% 1/16W 0402", Manufacturer=Yageo, POWER=63mW, SUPPLIER PART NUMBER 1=9239359, ComponentLink1Description=Manufacturer, ComponentLink1URL=http://www.yageo.com/NewPortal/_en/index.jsp, ComponentLink2Description=Datasheet, ComponentLink2URL=http://www.farnell.com/datasheets/2167052.pdf, Manufacturer Part Number=RC0402FR-0710KL, Precision=±1%, SUPPLIER 1=Farnell, SUPPLIER 2=JLCPCB, Supplier Footprint 2=0402, SUPPLIER PART NUMBER 2=C25744, Type="Thick Film", Vmax=50V
R3: "RES SMD 10K OHM 1% 1/10W 0603", Manufacturer=Yageo, POWER=100mW, SUPPLIER PART NUMBER 1=9238603, ComponentLink1Description=Manufacturer, ComponentLink1URL=http://www.yageo.com/NewPortal/_en/index.jsp, ComponentLink2Description=Datasheet, ComponentLink2URL=http://www.farnell.com/datasheets/2167052.pdf, Manufacturer Part Number=RC0603FR-0710KL, Precision=±1%, SUPPLIER 1=Farnell, SUPPLIER 2=JLCPCB, Supplier Footprint 2=0603, SUPPLIER PART NUMBER 2=C25804, Type="Thick Film", Vmax=50V
R4: "RES SMD 4K7 OHM 1% 1/16W 0402", Manufacturer=Yageo, POWER=63mW, SUPPLIER PART NUMBER 1=9239316, ComponentLink1Description=Manufacturer, ComponentLink1URL=http://www.yageo.com/NewPortal/_en/index.jsp, ComponentLink2Description=Datasheet, ComponentLink2URL=http://www.farnell.com/datasheets/2167052.pdf, Manufacturer Part Number=RC0402FR-074K7L, Precision=±1%, SUPPLIER 1=Farnell, SUPPLIER 2=JLCPCB, Supplier Footprint 2=0402, SUPPLIER PART NUMBER 2=C25900, Type="Thick Film", Vmax=50V
R5: "RES SMD 2K7 OHM 1% 1/8W 0805", Manufacturer=Yageo, POWER=125mW, SUPPLIER PART NUMBER 1=9237666, ComponentLink1Description=Manufacturer, ComponentLink1URL=http://www.yageo.com/NewPortal/_en/index.jsp, ComponentLink2Description=Datasheet, ComponentLink2URL=http://www.farnell.com/datasheets/444164.pdf, Manufacturer Part Number=RC0805FR-072K7L, Precision=±1%, SUPPLIER 1=Farnell, SUPPLIER 2=JLCPCB, Supplier Footprint 2=0805, SUPPLIER PART NUMBER 2=C17530, Type="Thick Film", Vmax=50V
R6: "RES SMD 1.8K OHM 1% 1/10W 0603", Manufacturer=Yageo, POWER=100mW, SUPPLIER PART NUMBER 1=9238514, ComponentLink1Description=Manufacturer, ComponentLink1URL=http://www.yageo.com/NewPortal/_en/index.jsp, ComponentLink2Description=Datasheet, ComponentLink2URL=http://www.farnell.com/datasheets/2167052.pdf, Manufacturer Part Number=RC0603FR-071K8L, Precision=±1%, SUPPLIER 1=Farnell, SUPPLIER 2=JLCPCB, Supplier Footprint 2=0603, SUPPLIER PART NUMBER 2=C4177, Type="Thick Film", Vmax=50V
R7: "RES SMD 1K OHM 1% 1/16W 0402", Manufacturer=Yageo, POWER=63mW, SUPPLIER PART NUMBER 1=9239235, ComponentLink1Description=Manufacturer, ComponentLink1URL=http://www.yageo.com/NewPortal/_en/index.jsp, ComponentLink2Description=Datasheet, ComponentLink2URL=http://www.farnell.com/datasheets/2167052.pdf, Manufacturer Part Number=RC0402FR-071KL, Precision=±1%, SUPPLIER 1=Farnell, SUPPLIER 2=JLCPCB, Supplier Footprint 2=0402, SUPPLIER PART NUMBER 2=C11702, Type="Thick Film", Vmax=50V
R8: "RES SMD 1K OHM 1% 1/10W 0603", Manufacturer=Yageo, POWER=100mW, SUPPLIER PART NUMBER 1=9238484, ComponentLink1Description=Manufacturer, ComponentLink1URL=http://www.yageo.com/NewPortal/_en/index.jsp, ComponentLink2Description=Datasheet, ComponentLink2URL=http://www.farnell.com/datasheets/2167052.pdf, Manufacturer Part Number=RC0603FR-071KL, Precision=±1%, SUPPLIER 1=Farnell, SUPPLIER 2=JLCPCB, Supplier Footprint 2=0603, SUPPLIER PART NUMBER 2=C21190, Type="Thick Film", Vmax=50V
R9: "RES SMD 620 OHM 1% 1/10W 0603", Manufacturer=Yageo, POWER=100mW, SUPPLIER PART NUMBER 1=311-620HRCT-ND, ComponentLink1Description=Manufacturer, ComponentLink1URL=http://www.yageo.com/NewPortal/_en/index.jsp, ComponentLink2Description=Datasheet, ComponentLink2URL=http://www.farnell.com/datasheets/1868787.pdf, Manufacturer Part Number=RC0603FR-07620RL, Precision=±1%, SUPPLIER 1=Digi-Key, SUPPLIER 2=JLCPCB, Supplier Footprint 2=0603, SUPPLIER PART NUMBER 2=C23220, Type="Thick Film", Vmax=50V
R10: "RES SMD 330 OHM 1% 1/16W 0402", Manufacturer=Yageo, POWER=63mW, SUPPLIER PART NUMBER 1=9239170, ComponentLink1Description=Manufacturer, ComponentLink1URL=http://www.yageo.com/NewPortal/_en/index.jsp, ComponentLink2Description=Datasheet, ComponentLink2URL=http://www.farnell.com/datasheets/2167052.pdf, Manufacturer Part Number=RC0402FR-07330RL, Precision=±1%, SUPPLIER 1=Farnell, SUPPLIER 2=JLCPCB, Supplier Footprint 2=0402, SUPPLIER PART NUMBER 2=C25104, Type="Thick Film", Vmax=50V
R11: "RES SMD 68 OHM 1% 1/10W 0603", Manufacturer=Yageo, POWER=100mW, SUPPLIER PART NUMBER 1=9238344, ComponentLink1Description=Manufacturer, ComponentLink1URL=http://www.yageo.com/NewPortal/_en/index.jsp, ComponentLink2Description=Datasheet, ComponentLink2URL=http://www.farnell.com/datasheets/1868787.pdf, Manufacturer Part Number=RC0603FR-0768RL, Precision=±1%, SUPPLIER 1=Farnell, SUPPLIER 2=JLCPCB, Supplier Footprint 2=0603, SUPPLIER PART NUMBER 2=C27592, Type="Thick Film", Vmax=50V
R12: "RES SMD 22 OHM 1% 1/16W 0402", Manufacturer=Yageo, POWER=63mW, SUPPLIER PART NUMBER 1=9239030, ComponentLink1Description=Manufacturer, ComponentLink1URL=http://www.yageo.com/NewPortal/_en/index.jsp, ComponentLink2Description=Datasheet, ComponentLink2URL=http://www.farnell.com/datasheets/2167052.pdf, Manufacturer Part Number=RC0402FR-0722RL, Precision=±1%, SUPPLIER 1=Farnell, SUPPLIER 2=JLCPCB, Supplier Footprint 2=0402, SUPPLIER PART NUMBER 2=C25092, Type="Thick Film", Vmax=50V
R13: "RES SMD 0 OHM 1% 1/10W 0603", Manufacturer=Yageo, POWER=100mW, SUPPLIER PART NUMBER 1=2309106, ComponentLink1Description=Manufacturer, ComponentLink1URL=http://www.yageo.com/NewPortal/_en/index.jsp, ComponentLink2Description=Datasheet, ComponentLink2URL=http://www.farnell.com/datasheets/2167052.pdf, Manufacturer Part Number=RC0603FR-070RL, Precision=±1%, SUPPLIER 1=Farnell, SUPPLIER 2=JLCPCB, Supplier Footprint 2=0603, SUPPLIER PART NUMBER 2=C21189, Type="Thick Film", Vmax=50V
U1: "USB VERS UART CMS SSOP28 232", Manufacturer=FTDI, SUPPLIER PART NUMBER 1=1146032, ComponentLink1Description=Datasheet, ComponentLink1URL=http://www.farnell.com/datasheets/2007793.pdf, Manufacturer Part Number=FT232RL, SUPPLIER 1=Farnell, SUPPLIER 2=JLCPCB, Supplier Footprint 2=SSOP-28_5.3x10.2x0.65P, SUPPLIER PART NUMBER 2=C8690
U2: "IC TRANSCEIVER CAN HI-SPD 8-SOIC", Manufacturer="Microchip Technology", SUPPLIER PART NUMBER 1=9758569, ComponentLink1Description=Datasheet, ComponentLink1URL=http://www.farnell.com/datasheets/657417.pdf, Manufacturer Part Number=MCP2551-I/SN, SUPPLIER 1=Farnell, SUPPLIER 2=JLCPCB, Supplier Footprint 2=SOIC-8_3.9x4.9x1.27P, SUPPLIER PART NUMBER 2=C7439
U3: "LDO 3.3V 100mA SOT89", Manufacturer=Holtek, SUPPLIER PART NUMBER 1=8850721, ComponentLink1Description=Datasheet, ComponentLink1URL=https://datasheet.lcsc.com/szlcsc/1812071811_Holtek-Semicon-HT7533-1_C14289.pdf, ComponentLink2Description=Manufacturer, ComponentLink2URL=https://www.holtek.com/productdetail/-/vg/75xx_1, Manufacturer Part Number=HT7533-1, SUPPLIER 1=RSComponents, SUPPLIER 2=JLCPCB, Supplier Footprint 2=SOT-89-3, SUPPLIER PART NUMBER 2=C14289, Type=LDO
U4: "LDO 3.3V 1A SOT223-3", Manufacturer="Diodes Inc.", SUPPLIER PART NUMBER 1=1825376, ComponentLink1Description=Datasheet, ComponentLink1URL=http://www.farnell.com/datasheets/1769101.pdf, ComponentLink2Description=Manufacturer, ComponentLink2URL=https://www.diodes.com/part/view/ZLDO1117, Manufacturer Part Number=ZLDO1117G33TA, SUPPLIER 1=Farnell, SUPPLIER 2=JLCPCB, Supplier Footprint 2=SOT-223, SUPPLIER PART NUMBER 2=C6186, Type=LDO

## Via types
v1: diameter 0.5, hole 0.2, Top Copper to Bottom Copper, tented both sides, 1 vias

## Nets (pads, with @x,y where several pads share a name; then routed paths per layer and width w, separated by ;. In a path a pad name is that pad's centre, name@x,y a point inside that pad or via, vN(x,y) a via of type N, cw(c..) or ccw(c..) an arc to the next point about the centre after c; other vN are vias at no path point)
pads on no net: C1.1 C1.2 C2.1 C2.2 C3.1 C3.2 C4.1 C4.2 C5.1 C5.2 C6.1 C6.2 C7.1 C7.2 C8.1 C8.2 C9.1 C9.2 D1.1 D1.2 D2.1 D2.2 D2.3 D2.4 D2.5 D2.6 D3.1 D3.2 D4.1 D4.2 FB1.1 FB1.2 Q1.1 Q1.2 Q1.3 R1.1 R1.2 R2.1 R2.2 R3.1 R3.2 R4.1 R4.2 R5.1 R5.2 R6.1 R6.2 R7.1 R7.2 R8.1 R8.2 R9.1 R9.2 R10.1 R10.2 R11.1 R11.2 R12.1 R12.2 R13.1 R13.2 U1.1 U1.2 U1.3 U1.4 U1.5 U1.6 U1.7 U1.8 U1.9 U1.10 U1.11 U1.12 U1.13 U1.14 U1.15 U1.16 U1.17 U1.18 U1.19 U1.20 U1.21 U1.22 U1.23 U1.24 U1.25 U1.26 U1.27 U1.28 U2.1 U2.2 U2.3 U2.4 U2.5 U2.6 U2.7 U2.8 U3.1 U3.2 U3.3 U4.1 U4.2 U4.3 U4.4
copper on no net:
  other v1: 12.875,23.775

## Polygon pours and split planes (outlines as drawn)
no net on Ground Plane (split plane): 4.069,36.081 4.075,36.08 4.076,36.08 36.075,36.08 36.092,36.082 36.33,36.073 36.583,36.046 36.834,36.001 37.08,35.938 37.322,35.858 37.557,35.76 37.785,35.646 38.004,35.516 38.213,35.371 38.411,35.211 38.598,35.038 38.771,34.851 38.931,34.653 39.076,34.444 39.206,34.225 39.32,33.997 39.418,33.762 39.498,33.52 39.561,33.274 39.606,33.023 39.633,32.77 39.642,32.532 39.641,32.519 39.606,32.519 39.604,32.515 39.606,32.511 39.64,32.512 39.64,4.079 39.606,4.079 39.604,4.075 39.64,4.075 39.604,4.075 39.64,4.075 39.642,4.059 39.633,3.821 39.606,3.568 39.561,3.317 39.498,3.07 39.418,2.829 39.32,2.594 39.206,2.366 39.076,2.147 38.931,1.938 38.771,1.739 38.598,1.553 38.411,1.38 38.213,1.22 38.004,1.075 37.785,0.945 37.557,0.831 37.322,0.733 37.08,0.653 36.834,0.59 36.583,0.545 36.33,0.517 36.092,0.509 36.075,0.51 4.075,0.51 4.059,0.509 3.821,0.517 3.568,0.545 3.317,0.59 3.07,0.653 2.829,0.733 2.594,0.831 2.366,0.945 2.147,1.075 1.938,1.22 1.739,1.38 1.553,1.553 1.38,1.739 1.22,1.938 1.075,2.147 0.945,2.366 0.831,2.594 0.733,2.829 0.653,3.07 0.59,3.317 0.545,3.568 0.517,3.821 0.509,4.059 0.51,4.075 0.51,32.51 0.544,32.51 0.546,32.515 0.51,32.515 0.51,32.516 0.509,32.532 0.517,32.77 0.545,33.023 0.59,33.274 0.653,33.52 0.733,33.762 0.831,33.997 0.945,34.225 1.075,34.444 1.22,34.653 1.38,34.851 1.553,35.038 1.739,35.211 1.938,35.371 2.147,35.516 2.366,35.646 2.594,35.76 2.829,35.858 3.07,35.938 3.317,36.001 3.568,36.046 3.821,36.073 4.059,36.082
no net on Power Plane (split plane): 4.069,36.081 4.075,36.08 4.076,36.08 36.075,36.08 36.092,36.082 36.33,36.073 36.583,36.046 36.834,36.001 37.08,35.938 37.322,35.858 37.557,35.76 37.785,35.646 38.004,35.516 38.213,35.371 38.411,35.211 38.598,35.038 38.771,34.851 38.931,34.653 39.076,34.444 39.206,34.225 39.32,33.997 39.418,33.762 39.498,33.52 39.561,33.274 39.606,33.023 39.633,32.77 39.642,32.532 39.641,32.519 39.606,32.519 39.604,32.515 39.606,32.511 39.64,32.512 39.64,4.079 39.606,4.079 39.604,4.075 39.64,4.075 39.604,4.075 39.64,4.075 39.642,4.059 39.633,3.821 39.606,3.568 39.561,3.317 39.498,3.07 39.418,2.829 39.32,2.594 39.206,2.366 39.076,2.147 38.931,1.938 38.771,1.739 38.598,1.553 38.411,1.38 38.213,1.22 38.004,1.075 37.785,0.945 37.557,0.831 37.322,0.733 37.08,0.653 36.834,0.59 36.583,0.545 36.33,0.517 36.092,0.509 36.075,0.51 4.075,0.51 4.059,0.509 3.821,0.517 3.568,0.545 3.317,0.59 3.07,0.653 2.829,0.733 2.594,0.831 2.366,0.945 2.147,1.075 1.938,1.22 1.739,1.38 1.553,1.553 1.38,1.739 1.22,1.938 1.075,2.147 0.945,2.366 0.831,2.594 0.733,2.829 0.653,3.07 0.59,3.317 0.545,3.568 0.517,3.821 0.509,4.059 0.51,4.075 0.51,32.51 0.544,32.51 0.546,32.515 0.51,32.515 0.51,32.516 0.509,32.532 0.517,32.77 0.545,33.023 0.59,33.274 0.653,33.52 0.733,33.762 0.831,33.997 0.945,34.225 1.075,34.444 1.22,34.653 1.38,34.851 1.553,35.038 1.739,35.211 1.938,35.371 2.147,35.516 2.366,35.646 2.594,35.76 2.829,35.858 3.07,35.938 3.317,36.001 3.568,36.046 3.821,36.073 4.059,36.082

## Keep-outs
Keep-Out Layer:
  lines w0.15: 0,4.075 ccw(c0.075,4.075) 0,4.075 ; 0,4.075 ccw(c4.075,4.075) 0,4.075 ccw(c4.075,4.075) 4.075,0 36.075,0 ccw(c36.075,4.075) 40.151,4.075 ; 0,4.075 0,32.515 cw(c0.075,32.515) 0,32.516 cw(c4.075,32.515) 4.075,36.591 ; 0,4.075 0,4.075 ; 4.076,36.591 ccw(c4.075,36.515) 4.075,36.591 ; 4.076,36.591 36.075,36.591 ; 36.075,36.591 cw(c36.075,32.515) 40.151,32.516 ; 36.075,36.591 36.075,36.591 ; 40.151,4.075 ccw(c36.075,4.075) 40.151,4.075 ; 40.151,4.075 ccw(c40.075,4.075) 40.151,4.075 ; 40.151,4.075 40.151,4.075 ; 40.151,4.075 ccw(c40.075,4.075) 40.151,4.075 ; 40.151,4.075 40.151,32.516 ; 40.151,32.515 ccw(c36.075,32.515) 40.151,32.516 ; 40.151,32.515 ccw(c40.075,32.515) 40.151,32.515 ; 40.151,32.515 ccw(c40.075,32.515) 40.151,32.516 ; 40.151,32.515 40.151,32.515

## Text inside footprints (layer, text, board x,y; h text height)
D1: Top 3D Body "K" at 15.475,5.015 h1 r270
D3: Top 3D Body "K" at 11.475,5.015 h1 r270